# Altium PCB Portablizer_PCBV4.PcbDoc
Units mm, origin at the board's own origin, x right, y up, seen from the top; angles counter-clockwise.
Board outline 73.91 x 92.08 mm, 2 copper layers (Top Layer, Bottom Layer); 79 components, 55 nets, 296 pads, 106 vias.
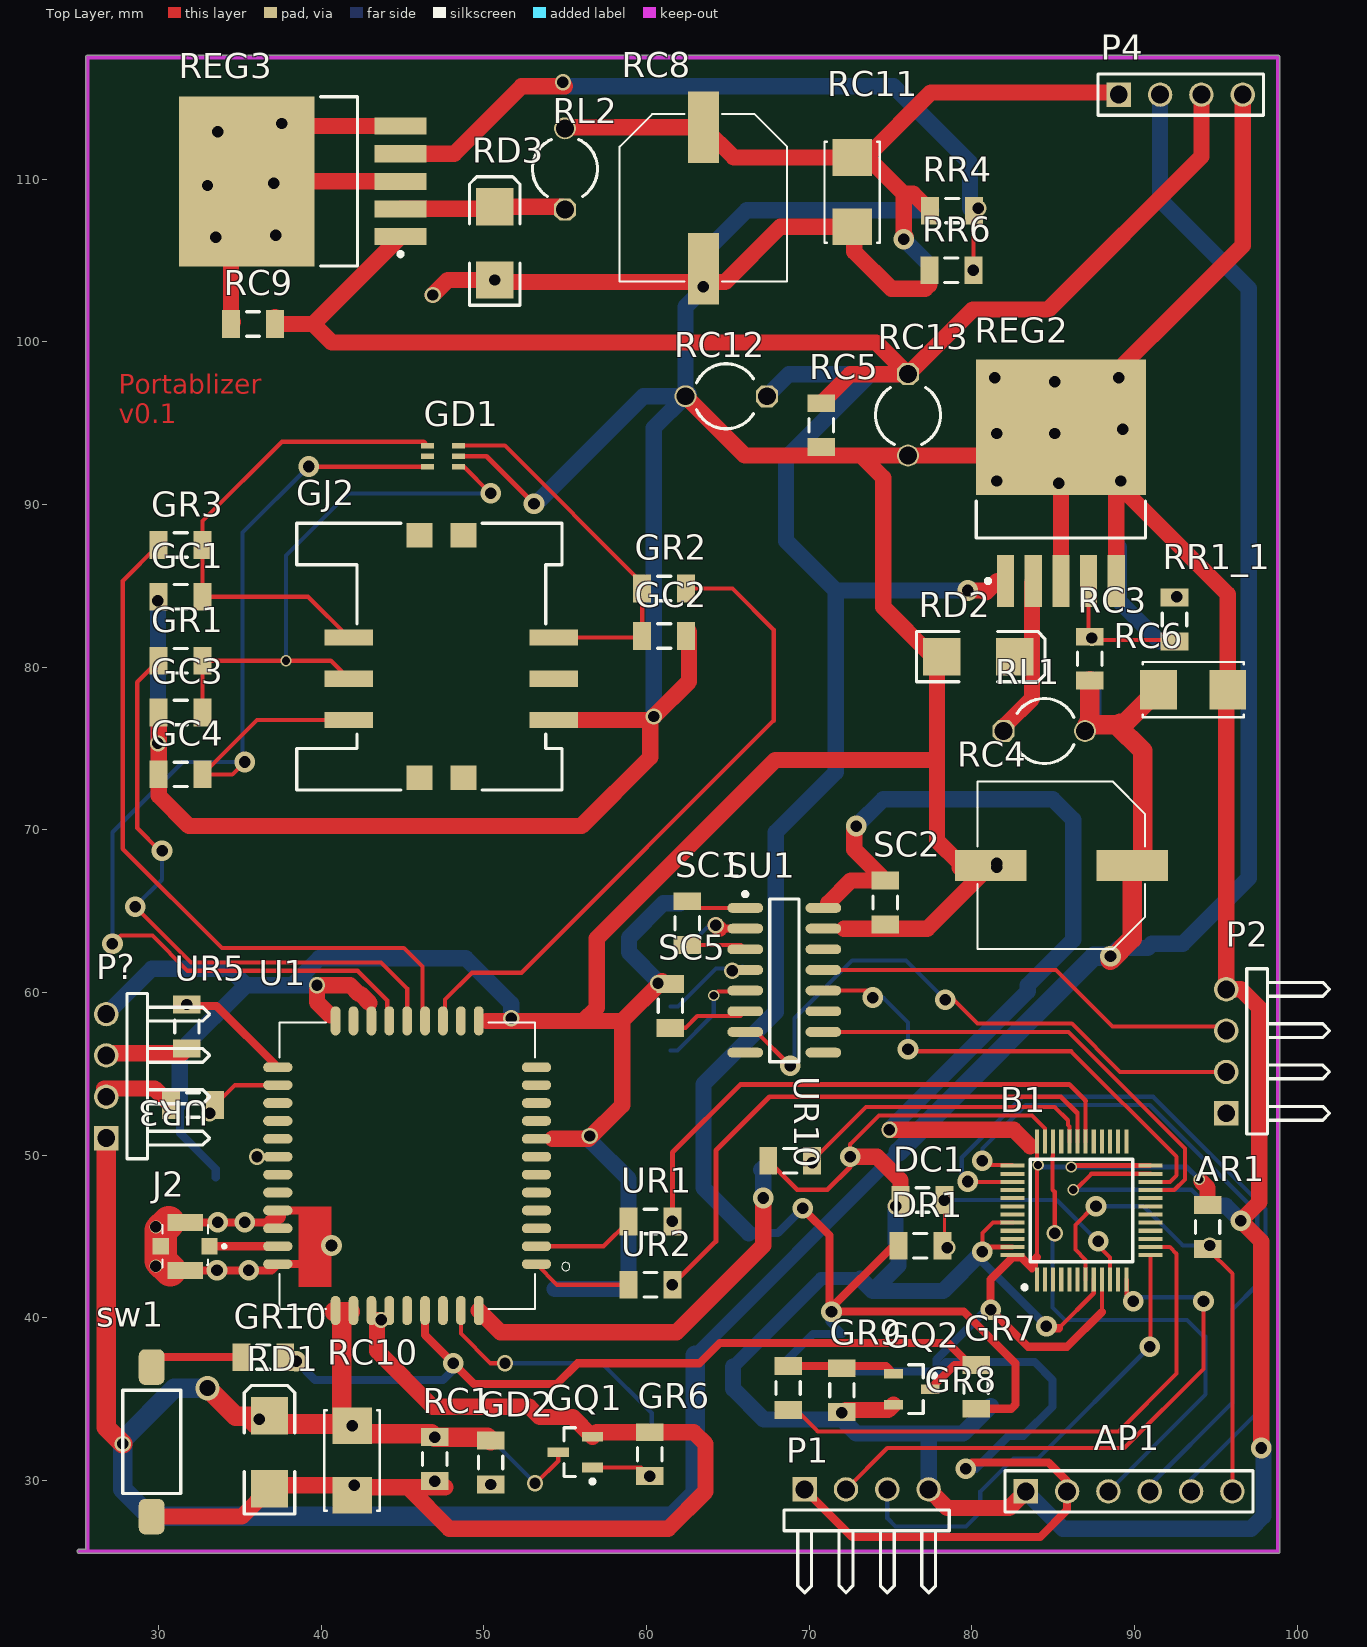
[diagram p0: Top Layer view]
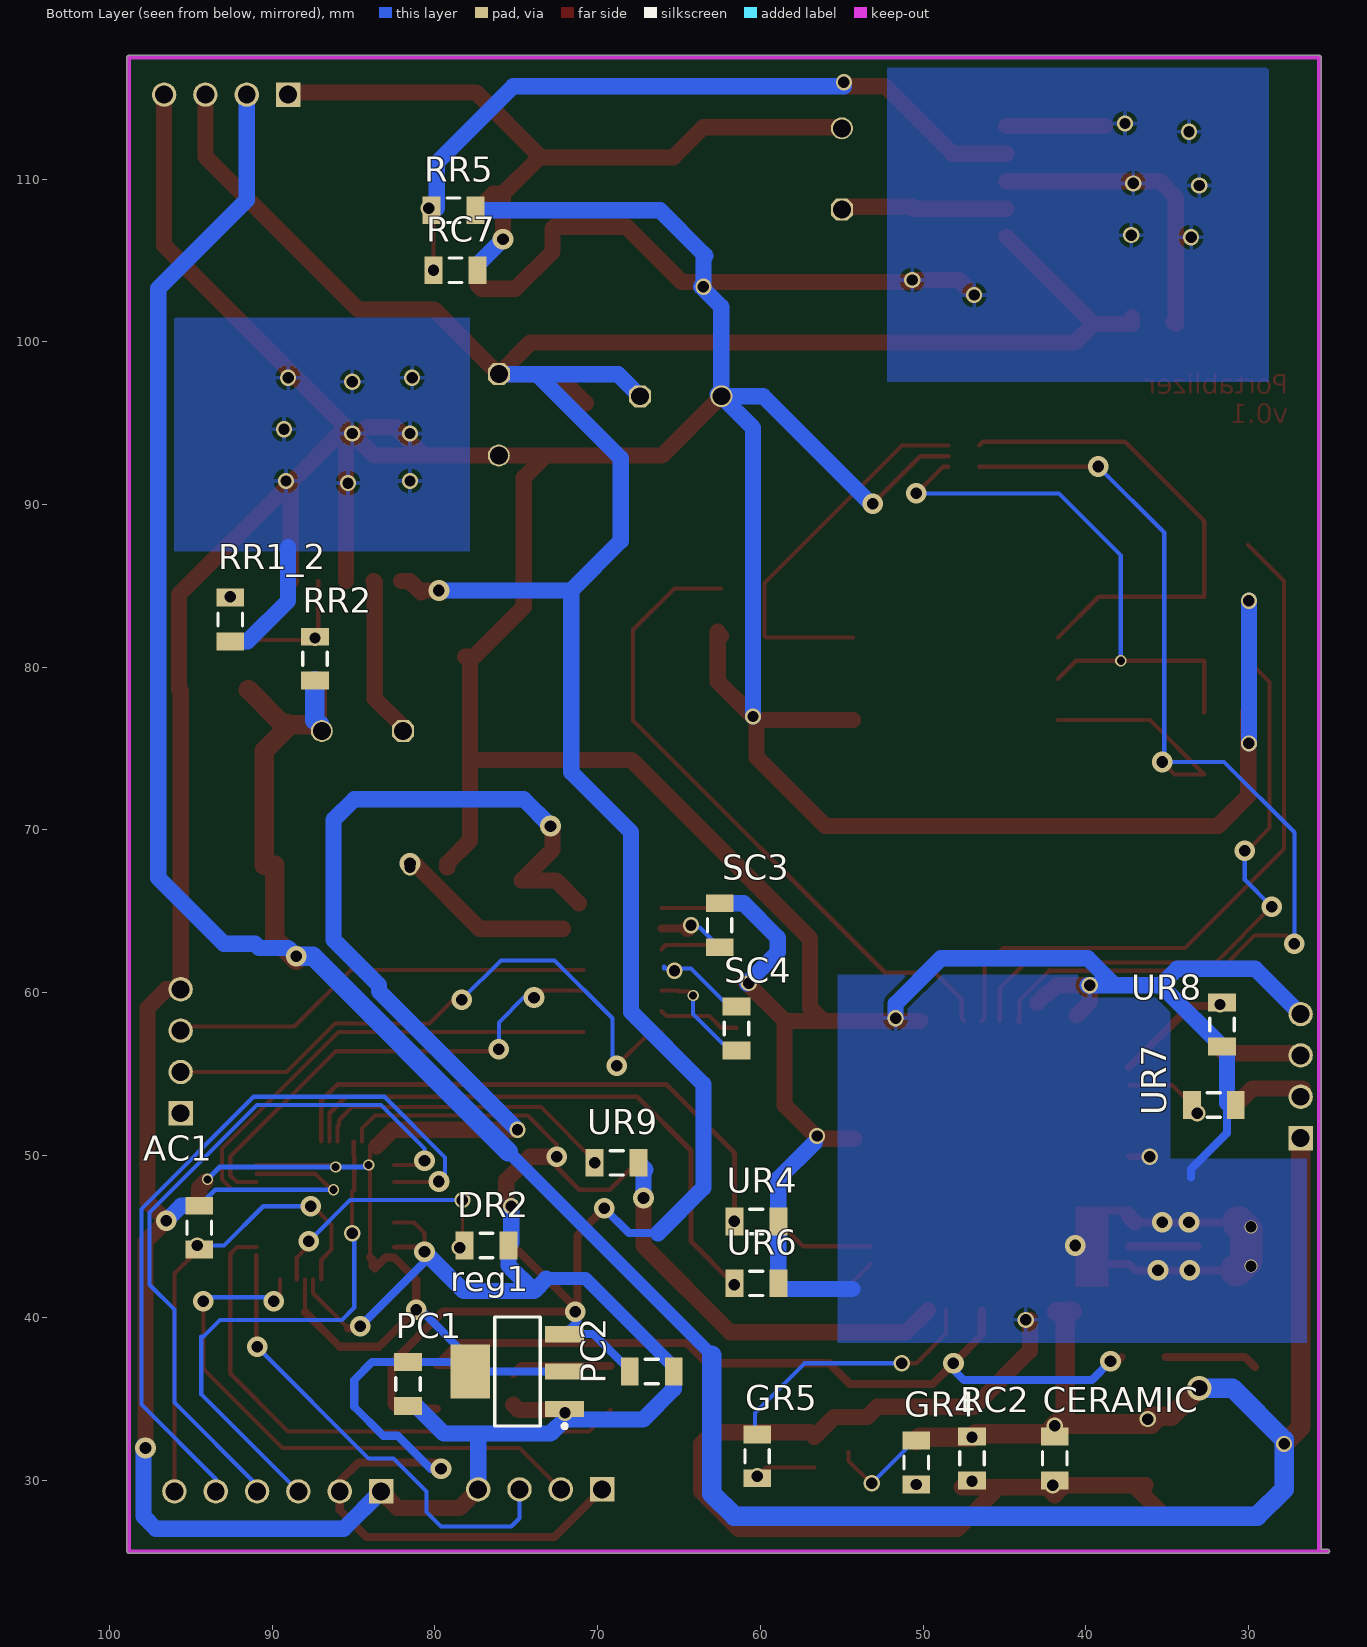
[diagram p1: Bottom Layer view, seen from below]

## Layer stack, top to bottom
Top Solder: solder mask 0.0102, Solder Resist, Dk 3.5
Top Layer: signal copper 0.0356
Dielectric 1: dielectric 0.32, FR-4, Dk 4.8
Bottom Layer: signal copper 0.0356
Bottom Solder: solder mask 0.0102, Solder Resist, Dk 3.5

## Board outline
25.146,25.527 cw(c25.146,25.654) 25.146,25.781 25.527,25.781 25.527,117.475 cw(c25.654,117.475) 25.654,117.602 98.806,117.602 cw(c98.806,117.475) 98.933,117.475 98.933,25.654 cw(c98.806,25.654) 98.806,25.527

## Design rules (kind name [scope] priority, off if disabled: settings)
Clearance [All] p1: gap=0.254 ignorepadtopadclearanceinfootprint=FALSE except(0: Arc-Hole Track-Hole SMDPad-Hole THPad-Hole Via-Hole Fill-Hole Poly-Hole Region-Hole Text-Hole)
PolygonConnect [All] p1: connectstyle=Relief reliefconductorwidth=0.254 reliefentries=4 polygonreliefangle="90 Angle" airgapwidth=0.254
RoutingVias [All] p1: holewidth=0.711 width=1.27 viastyle="Through Hole" minholewidth=0.711 minwidth=1.27 maxholewidth=0.711 maxwidth=1.27
SolderMaskExpansion [All] p1: expansion=0.102
Width Width_1 [(InNet('3.3V') OR InNet('5V_POS') OR InNet('NetRD2_2') OR InNet('9V')OR InNet('NetRD3_2') OR InNet('v12') OR InNet('GND'))] p1: maxlimit=1.2 minlimit=0.254 preferedwidth=0.7 minimp=50.000000 maximp=50.000000 favimp=50.000000
Width [All] p2: maxlimit=1.5 minlimit=0.256 preferedwidth=0.3 minimp=50.000000 maximp=50.000000 favimp=50.000000
30 further rules are at their usual default settings.

## Components (designator, comment, footprint, x,y, rotation, side; value= is the part's Value field where it differs from the comment)
AC1 "Cap Semi" C1206 94.488,45.546 r90 bottom value=100pF
AP1 "ARM CONNECTOR" HDR1X6 83.312,29.337 r0 top
AR1 "Res3" c1206 94.488,45.593 r270 top value=10K
B1 "STM32F100C8T6B" QFP50P900X900X160-48N 86.741,46.609 r90 top
CERAMIC "1~10uF" C1206 41.91,31.369 r90 bottom
DC1 "33pF" C1206 76.962,47.244 r0 top
DR1 "Res3" c1206 76.835,44.432 r0 top value=3M
DR2 "Res3" c1206 76.835,44.45 r180 bottom value=1M
GC1 "33pF" C1206 31.369,84.328 r0 top
GC2 "22pF" C1206 61.087,81.915 r180 top
GC3 "33pF" C1206 31.369,77.216 r0 top
GC4 "100nF" C1206 31.369,73.406 r180 top
GD1 "SMF05C.TCT" SC70-6 47.498,92.964 r90 top
GD2 "LED2" C1206 50.419,31.115 r270 top
GJ2 "SIM_HOLDER" GCT_SIM2055-6-0-XX-00-X_REVI 48.006,80.645 r90 top
GQ1 "PMBT3904" SOT23_N#1 55.626,31.75 r180 top
GQ2 "PMBT3904" SOT23_N#2 76.309,35.621 r0 top
GR1 "51" C1206 31.369,80.391 r180 top
GR2 "51" C1206 61.087,84.836 r0 top
GR3 "51" C1206 31.369,87.503 r180 top
GR4 "4.7k" C1206 50.419,31.115 r270 bottom
GR5 "4.7k" C1206 60.198,31.496 r90 bottom
GR6 "47k" C1206 60.198,31.623 r270 top
GR7 "4.7k" C1206 80.264,35.767 r270 top
GR8 "4.7k" C1206 68.707,35.687 r270 top
GR9 "47k" C1206 72.009,35.56 r90 top
GR10 "4.7k" C1206 36.449,37.592 r180 top
J2 "1661" MOLEX_1661 31.648,44.399 r90 top
P1 "DEBUG" HDR1X4H 69.723,29.464 r0 top
P2 "POS_CONNECTOR" HDR1X4H 95.631,52.578 r90 top
P4 "Header 4" HDR1X4 89.027,115.189 r0 top
P? "DEBUG" HDR1X4H 26.797,51.054 r90 top
PC1 "Cap Semi" C1206 81.661,35.941 r270 bottom value=22uF
PC2 "PC1" C1206 66.675,36.703 r180 bottom value=10uF
RC1 "33pF" C1206 46.99,31.323 r90 top
RC2 "10pF" C1206 46.99,31.369 r90 bottom
RC3 "15nF" C1206 87.249,80.518 r90 top
RC4 "470 μF; 25 V" "WCAP-PSLC 10x12.4x4.5" 85.503,67.818 r180 top
RC5 "100nF" C1206 70.739,94.869 r270 top
RC6 "10uF; 25V" CAPCP6032X280N 93.599,78.613 r0 top
RC7 "15nF" C1206 78.74,104.394 r0 bottom
RC8 "470 μF; 25 V" "WCAP-PSLC 10x12.4x4.5" 63.5,108.839 r270 top
RC9 "100nF" C1206 35.814,101.092 r180 top
RC10 "10uF; 25V" CAPCP6032X280N 41.91,31.242 r270 top
RC11 "10uF; 25V" CAPCP6032X280N 72.644,109.195 r270 top
RC12 "1000uF 16V" CAPR5-4X5 64.897,96.647 r180 top value=100pF
RC13 "1000uF 16V" CAPR5-4X5 76.073,95.504 r270 top value=100pF
RD1 "CDZ55" SMB 36.83,31.75 r90 top
RD2 "SM5822" SMB 80.391,80.645 r0 top
RD3 "SM5822" SMB 50.673,106.045 r90 top
reg1 "ams1117-3.3" SOT223_N 74.93,36.703 r0 bottom
REG2 "LM2596S-ADJ" TS5B_N 85.471,91.292 r90 top
REG3 "LM2596S-ADJ" TS5B_N 38.883,109.855 r180 top
RL1 "68uH 3.1A (47 33)" CAPR5-4X5 84.455,76.073 r0 top value=10mH
RL2 "68uH 3.1A (47 33)" CAPR5-4X5 54.991,110.617 r90 top value=10mH
RR1_1 "1k; 1%" C1206 92.456,82.931 r270 top
RR1_2 "1k; 1%" C1206 92.583,82.931 r90 bottom
RR2 "4.7k; 1%" C1206 87.376,80.518 r90 bottom
RR4 "5.6k; 1%" C1206 78.787,108.059 r0 top
RR5 "1.8k; 1%" C1206 78.867,108.077 r0 bottom
RR6 "33k; 1%" C1206 78.74,104.394 r0 top
SC1 "100nF" C1206 62.502,64.262 r90 top
SC2 "100nF" C1206 74.676,65.532 r90 top
SC3 "100nF" C1206 62.502,64.135 r90 bottom
SC4 "100nF" C1206 61.468,57.785 r270 bottom
SC5 "100nF" C1206 61.468,59.182 r270 top
SU1 "MAX3232ESE+" SO-16_N 68.471,60.753 r0 top
sw1 "Switch PB" "TE FSMSMTR" 29.591,32.385 r180 top
U1 "SIM800C" LCC110P1570X1760X250-42N 45.292,49.356 r180 top
UR1 "Res3" c1206 60.245,45.932 r0 top value=1K
UR2 "Res3" c1206 60.245,42.037 r180 top value=1K
UR3 "Res3" c1206 32.131,53.086 r180 top value=1K
UR4 "Res3" c1206 60.245,45.932 r180 bottom value=5.6K
UR5 "Res3" c1206 31.75,57.912 r90 top value=1K
UR6 "Res3" c1206 60.245,42.122 r180 bottom value=5.6K
UR7 "Res3" c1206 32.131,53.086 r180 bottom value=5.6K
UR8 "Res3" c1206 31.623,58.039 r270 bottom value=5.6K
UR9 "Res3" c1206 68.834,49.53 r180 bottom value=1K
UR10 "Res3" c1206 68.834,49.657 r180 top value=5.6K

## Footprints (in the part's own frame and the unit in brackets; to place one, negate y for a bottom-side part, rotate by r counter-clockwise, add the part's x,y. Pads: shape width x height; smd on the part's side, far side on the other; paste and mask are expansions set on the pad)
C1206 [mm] "Chip Capacitor, Body 3.2x1.6mm, IPC High Density"
  rect 1.1x1.7 smd: 1(-1.35,0) 2(1.35,0)
  silkscreen extent -0.4,-0.75 0.4,0.75, body extent -1.7,-0.9 1.7,0.9, height 1.3
c1206 [mm]
  rect 1.1x1.7 smd: 1(-1.35,0) 2(1.35,0)
  silkscreen extent -0.4,-0.75 0.4,0.75, body extent -1.7,-0.9 1.7,0.9, height 1.3
CAPCP6032X280N [mil]
  rect 89x95 smd: 1(-84,0) 2(84,0)
  silkscreen extent -122,-67 122,67
CAPR5-4X5 [mm]
  oct 1.35x1.35 hole 1.1: 1(-2.5,0)
  round 1.35 hole 1.1: 2(2.5,0)
  silkscreen extent -1.69,-2 1.82,2
GCT_SIM2055-6-0-XX-00-X_REVI [mm]
  rect 1.5x1.6 smd: 8(-7.45,-0.75) 9(7.45,-0.75) 10(7.45,1.95) 11(-7.45,1.95)
  rect 1x3 smd: C1(-3.9,6.3) C2(-1.36,6.3) C3(1.18,6.3) C5(-3.9,-6.3) C6(-1.36,-6.3) C7(1.18,-6.3)
  silkscreen extent -8.2,-6.8 8.2,9.5
HDR1X4 [mm] "Connector; Header; 4 Position"
  rect 1.5x1.5 hole 1.1: 1(0,0)
  round 1.5 hole 1.1: 2(2.54,0) 3(5.08,0) 4(7.62,0)
  silkscreen extent -1.27,-1.27 8.89,1.27
HDR1X4H [mm] "Connector; Header; 4 Position; Right Angle"
  rect 1.5x1.5 hole 1.1: 1(0,0)
  round 1.5 hole 1.1: 2(2.54,0) 3(5.08,0) 4(7.62,0)
  silkscreen extent -1.27,-6.35 8.89,-1.27
HDR1X6 [mm] "Connector; Header; 6 Position"
  rect 1.5x1.5 hole 1.1: 1(0,0)
  round 1.5 hole 1.1: 2(2.54,0) 3(5.08,0) 4(7.62,0) 5(10.16,0) 6(12.7,0)
  silkscreen extent -1.27,-1.27 13.97,1.27
LCC110P1570X1760X250-42N [mm]
  oval 1.8x0.6 smd: 1(-7.95,6.05) 2(-7.95,4.95) 3(-7.95,3.85) 4(-7.95,2.75) 5(-7.95,1.65) 6(-7.95,0.55) 7(-7.95,-0.55) 8(-7.95,-1.65) 9(-7.95,-2.75) 10(-7.95,-3.85) 11(-7.95,-4.95) 12(-7.95,-6.05) 22(7.95,-6.05) 23(7.95,-4.95) 24(7.95,-3.85) 25(7.95,-2.75) 26(7.95,-1.65) 27(7.95,-0.55) 28(7.95,0.55) 29(7.95,1.65) 30(7.95,2.75) 31(7.95,3.85) 32(7.95,4.95) 33(7.95,6.05)
  oval 0.6x1.8 smd: 13(-4.4,-8.9) 14(-3.3,-8.9) 15(-2.2,-8.9) 16(-1.1,-8.9) 17(0,-8.9) 18(1.1,-8.9) 19(2.2,-8.9) 20(3.3,-8.9) 21(4.4,-8.9) 34(4.4,8.9) 35(3.3,8.9) 36(2.2,8.9) 37(1.1,8.9) 38(0,8.9) 39(-1.1,8.9) 40(-2.2,8.9) 41(-3.3,8.9) 42(-4.4,8.9)
  silkscreen extent -10,-8.8 7.85,8.8
MOLEX_1661 [mm]
  rect 1x1 smd: 1(0,-1.5) 3(0,1.5)
  rect 1.05x2.2 smd: 2(-1.475,0) 4(1.475,0)
  silkscreen extent -1.3,-2.5 1.3,1.4
QFP50P900X900X160-48N [mm]
  rect 1.475x0.25 smd: 1(-4.238,2.75) 2(-4.238,2.25) 3(-4.238,1.75) 4(-4.238,1.25) 5(-4.238,0.75) 6(-4.238,0.25) 7(-4.238,-0.25) 8(-4.238,-0.75) 9(-4.238,-1.25) 10(-4.238,-1.75) 11(-4.238,-2.25) 12(-4.238,-2.75) 25(4.238,-2.75) 26(4.238,-2.25) 27(4.238,-1.75) 28(4.238,-1.25) 29(4.238,-0.75) 30(4.238,-0.25) 31(4.238,0.25) 32(4.238,0.75) 33(4.238,1.25) 34(4.238,1.75) 35(4.238,2.25) 36(4.238,2.75)
  rect 0.25x1.475 smd: 13(-2.75,-4.238) 14(-2.25,-4.238) 15(-1.75,-4.238) 16(-1.25,-4.238) 17(-0.75,-4.238) 18(-0.25,-4.238) 19(0.25,-4.238) 20(0.75,-4.238) 21(1.25,-4.238) 22(1.75,-4.238) 23(2.25,-4.238) 24(2.75,-4.238) 37(2.75,4.238) 38(2.25,4.238) 39(1.75,4.238) 40(1.25,4.238) 41(0.75,4.238) 42(0.25,4.238) 43(-0.25,4.238) 44(-0.75,4.238) 45(-1.25,4.238) 46(-1.75,4.238) 47(-2.25,4.238) 48(-2.75,4.238)
  silkscreen extent -4.85,-3.15 3.15,3.62
SC70-6 [mm]
  rect 0.35x0.8 smd: 1(-0.65,-0.95) 2(0,-0.95) 3(0.65,-0.95) 4(0.65,0.95) 5(0,0.95) 6(-0.65,0.95)
SMB [mm]
  rect 2.3x2.3 smd: 1(-2.25,0) 2(2.25,0)
  silkscreen extent -3.8,-1.55 4.1,1.55
SO-16_N [mm] "SOIC, 16-Leads, Body 9.9x3.9mm, Pitch 1.27mm, IPC Medium Density"
  oval 2.2x0.6 smd: 1(-2.4,4.445) 2(-2.4,3.175) 3(-2.4,1.905) 4(-2.4,0.635) 5(-2.4,-0.635) 6(-2.4,-1.905) 7(-2.4,-3.175) 8(-2.4,-4.445) 9(2.4,-4.445) 10(2.4,-3.175) 11(2.4,-1.905) 12(2.4,-0.635) 13(2.4,0.635) 14(2.4,1.905) 15(2.4,3.175) 16(2.4,4.445)
  silkscreen extent -2.52,-5 0.9,5.42, body extent -2,-5 2,5, height 1.75
SOT23_N#1 [mm]
  rect 1.3x0.6 smd: 1(-1.05,0.95) 2(-1.05,-0.95) 3(1.05,0)
  silkscreen extent -1.18,-1.5 0.7,1.92, body extent -0.7,-1.5 0.7,1.5, height 1.1
SOT23_N#2 [mm] "SOT23, 3-Leads, Body 2.9x1.3mm, Pitch 0.95mm, Lead Span 2.3mm - Reverse Pinning, IPC Medium Density"
  rect 1.15x0.6 smd: 1(-1.125,0.95) 2(-1.125,-0.95) 3(1.125,0)
  silkscreen extent -0.2,-1.5 1.48,1.5, body extent -0.7,-1.5 0.7,1.5, height 1.1
SOT223_N [mm] "SOT223, 4-Leads, Body 6.5x3.5mm, Pitch 2.3mm, Lead Span 7mm, IPC Medium Density"
  rect 2.4x1 smd: 1(-2.9,2.3) 2(-2.9,0) 3(-2.9,-2.3)
  rect 2.4x3.3 smd: 4(2.9,0)
  silkscreen extent -3.02,-3.35 1.4,3.47, body extent -1.85,-3.35 1.85,3.35, height 1.7
"TE FSMSMTR" [mm]
  rrect50% 1.6x2.19 smd: 1(0,4.595) 2(0,-4.595)
  silkscreen extent -1.78,-3.18 1.78,3.18, body extent -1.75,-4.98 1.75,4.98, height 4.42
TS5B_N [mm]
  rect 3.2x1.05 smd: 1(-6,3.4) 2(-6,1.7) 3(-6,0) 4(-6,-1.7) 5(-6,-3.4)
  rect 8.3x10.45 smd: 6(3.45,0)
  silkscreen extent -6.12,-5.2 -1.1,5.2, body extent -3.35,-5.2 6.05,5.2, height 4.65
"WCAP-PSLC 10x12.4x4.5" [mm]
  rect 4.4x1.9 smd: 1(-4.35,0) 2(4.35,0)
  silkscreen extent -5.15,-5.15 5.15,5.15, body extent -5.5,-5.15 5.5,5.15, height 12.45

## Part data
AC1 PC1: "Capacitor (Semiconductor SIM Model)", LatestRevisionDate=29-May-2009, LatestRevisionNote="IPC-7351 Footprint Added.", PackageDescription="Chip Capacitor", PackageReference=C1206, Published=8-Jun-2000, Publisher="Altium Limited"
AP1: library part "Header 6", "Header, 6-Pin", LatestRevisionDate=17-Jul-2002, LatestRevisionNote="Re-released for DXP Platform.", Publisher="Altium Limited"
AR1 DR1 DR2 UR1 UR2 UR3 UR4 UR5 UR6 UR7 UR8 UR9 UR10: "Resistor", LatestRevisionDate=29-May-2009, LatestRevisionNote="IPC-7351 Footprint Added.", PackageDescription="Chip Resistor", PackageReference=J1-0603, Published=8-Jun-2000, Publisher="Altium Limited"
B1: "STM32F100C8T6B, 32 bit ARM Cortex M3 Microcontroller 24MHz 64 kB Flash, 8 kB RAM, I2C 48-Pin LQFP", Manufacturer_Name=STMicroelectronics, Arrow Part Number=STM32F100C8T6B, Datasheet Link=https://www.arrow.com/en/products/stm32f100c8t6b/stmicroelectronics, Geometry.Height=1.6mm, Manufacturer_Part_Number=STM32F100C8T6B
CERAMIC DC1 RC1 RC2 RC3 RC6 RC7 RC10 RC11: library part Cap, "Capacitor", LatestRevisionDate=17-Jul-2002, LatestRevisionNote="Re-released for DXP Platform.", PackageDescription="Radial Cap, Thru-Hole; 2 Leads; 0.3 in Pin Spacing", PackageReference=RAD-0.3, Published=8-Jun-2000, Publisher="Altium Limited", STATE=NOT-AVAILABLE, TYPE=tantalum
GC1 GC2 GC3 GC4 RC5 RC9: library part Cap-Bipolar, "Bipolar Capacitor", Voltage=100V, Adding Date=1387/12/20, Designer="Saeid Jorablo", Organazation=ControTec
GD1: Package="SOT-363 Diodes Inc.", Availability=Unavailable, MF=Semtech, MP=SMF05C.TCT, Price=None
GD2: "Typical RED, GREEN, YELLOW, AMBER GaAs LED", LatestRevisionDate=17-Jul-2002, LatestRevisionNote="Re-released for DXP Platform.", PackageDescription="SM LED; 2 Flat Leads", PackageReference=3.2X1.6X1.1, PackageVersion=Feb-2002, Published=8-Jun-2000, Publisher="Altium Limited"
GJ2: library part SIM5051-6-0-18-00-X_REVF, "Memory Socket, Sim Card, 6pos", Package=None, Availability=Unavailable, MF="Global Connector Technology", MP="SIM5051-6-0-18-00-A REV C", Price=None
GQ1 GQ2: "NPN Switching Transistor", ComponentLink1Description="Manufacturer Link", ComponentLink1URL=http://www.semiconductors.philips.com/, ComponentLink2Description=Datasheet, ComponentLink2URL=http://www.semiconductors.philips.com/acrobat/datasheets/PMBT3904_4.pdf, DatasheetVersion=27-Apr-1999, LatestRevisionDate=12-Dec-2006, LatestRevisionNote="IPC-7351 Footprint Added.", PackageDescription="3-Pin SOT-23 Package 0.95 mm Pitch, 2.3 mm Lead Span", PackageReference=SOT23, PackageVersion=May-1999, Published=17-Sep-2003, Publisher="Altium Limited"
GR1 GR2 GR3 GR4 GR5 GR6 GR7 GR8 GR9 GR10: library part Resistor, "Resistor"
J2: "uFL SMT Antenna Connector", Package=None, Availability=Unavailable, MF="Keystone Electronics", MP=1661, Price=None, SnapEDA_Link=https://www.snapeda.com/parts/1661/Keystone%20Electronics/view-part/?ref=snap
P1 P2 P?: library part "Header 4H", "Header, 4-Pin, Right Angle", LatestRevisionDate=17-Jul-2002, LatestRevisionNote="Re-released for DXP Platform.", Publisher="Altium Limited"
P4: "Header, 4-Pin", LatestRevisionDate=17-Jul-2002, LatestRevisionNote="Re-released for DXP Platform.", Publisher="Altium Limited"
PC2: library part "Cap Semi", "Capacitor (Semiconductor SIM Model)", LatestRevisionDate=29-May-2009, LatestRevisionNote="IPC-7351 Footprint Added.", PackageDescription="Chip Capacitor", PackageReference=C1206, Published=8-Jun-2000, Publisher="Altium Limited"
RC4 RC8: library part "WCAP-PSLC 10x12.4x4.5 875075361006", "WCAP-PSLC Aluminum Polymer Capacitors , 680 µF; + / - 20%; 16 V , 10 x 12,4", Capacitance="680 µF", Manufacturer="Wurth Elektronik", partNo=875075361006, Application="Low voltage port filtering, appplid to high-end switching power supply, PC(desktop,laptop ),industrial computer, VGA card, server power, charger, TV, digital set-top box,DC-DC power module, game machine etc which consume large current with high speed circuit.", Characteristics="Aluminum Polymer Capacitors; Recommended soldering: Reflow; Operating temperature: –55 °C to +105 °C; Large capacitance SMD product series; Very low ESR at high frequency range; High permissible ripple current; Long life and high reliability; Load life: 2000 h @ +105 °C", ComponentLink1Description=Manufacturer, ComponentLink1URL=http://www.we-online.com, ComponentLink2Description=Datasheet, ComponentLink2URL=http://katalog.we-online.de/pbs/datasheet/875075361006.pdf, Created by="Karrer Zheng", Created Date=6/8/2015, E-mail=libraries@we-online.com
RC12 RC13: library part "Cap Pol1", "Polarized Capacitor (Radial)", LatestRevisionDate=17-Jul-2002, LatestRevisionNote="Re-released for DXP Platform.", PackageDescription="Polarized Capacitor (Radial); 2 Leads", PackageReference=RB7.6-15, Published=8-Jun-2000, Publisher="Altium Limited"
RD1 RD2 RD3: library part "D Schottky", "Schottky Diode", Code_JEDEC=DO-214-AA, LatestRevisionDate=17-Jul-2002, LatestRevisionNote="Re-released for DXP Platform.", PackageDescription="DO-214-AA/SMB; 2 C-Bend Leads; Body 5.3 x 3.6 mm, inc. leads (LxW)", PackageReference=SMB, Published=8-Jun-2000, Publisher="Altium Limited"
REG2 REG3: "SIMPLE SWITCHER® Power Converter 150 KHz 3A Step-Down Voltage Regulator, 5-pin TO-263", Manufacturer="National Semiconductor", PackageTopMarking="NSUZXYTTE#*LM2596S*-ADJ P+", PowerWise=N, Supplier Part Number 1=1523864, Code_JEDEC=MO-169-AB, ComponentLink1Description="LM2596 Datasheet", ComponentLink1URL=http://www.national.com/ds/LM/LM2596.pdf, ComponentLink2Description="LM2596 Web Page", ComponentLink2URL=http://www.national.com/pf/LM/LM2596.html, ComponentLink3Description="TS5B Package Page", ComponentLink3URL=http://www.national.com/packaging/folders/ts5b.html, CompType=Switcher, DatasheetVersion=May-2002, PackageDescription="TO-263, Molded, .400 x .390 x .180in, 5 Lead, .067in Pitch, Surface Mount", PackageReference=TS5B, PackageVersion="revD, Apr-2005", PartNumber=LM2596S-ADJ, PinCount=5, Published=4-Dec-2008, Publisher="Altium Limited", RoHS=N, Supplier 1=Farnell, Supplier 2=Farnell, Supplier Part Number 2=9494367
RL1 RL2: library part Inductor, "Inductor", Code_IEC=1005, Code_JEITA=0402, LatestRevisionDate=29-May-2009, LatestRevisionNote="IPC-7351 Footprint Added.", PackageDescription="Chip Inductor", PackageReference=0402-A, Published=8-Jun-2000, Publisher="Altium Limited"
RR1_1 RR1_2 RR2 RR4 RR5 RR6: library part Res1, "Resistor", LatestRevisionDate=17-Jul-2002, LatestRevisionNote="Re-released for DXP Platform.", PackageDescription="Axial Device, Thru-Hole; 2 Leads; 0.3 in Pin Spacing", PackageReference=AXIAL-0.3, Published=8-Jun-2000, Publisher="Altium Limited"
SC1 SC2 SC3 SC4 SC5: library part "Cap Semi", "Capacitor", Dielectric=X7R, Package=0603, Tolerance=10%, Category=Capacitor, Company=AVX, Foreign Supplyer=False, Subcategory=Ceramic
SU1: library part MAX3232CSE, "3.0V TO 5.5V, Low-Power, up to 1Mbps, True RS-232 Transceiver Using Four 0.1µF External Capacitor", Package=SO16, Category=IC, Company=MAXIM, Foreign Supplyer=False, Part Number=MAX3232ESE+, Subcategory=MAX
sw1: "Push Button Switch"
U1: "Module: GSM/Bluetooth; GPRS; 2G; 1800MHz, 900MHz; 85.6kbps; SMD", Package=None, Availability=Unavailable, MF=Simcom, MP=SIM800C, Price=None, SnapEDA_Link=https://www.snapeda.com/parts/SIM800C/Simcom/view-part/?ref=snap

## Via types
v1: diameter 1, hole 0.7, Top Layer to Bottom Layer, 57 vias
v2: diameter 1.27, hole 0.711, Top Layer to Bottom Layer, 40 vias
v3: diameter 0.7, hole 0.5, Top Layer to Bottom Layer, 6 vias
v4: diameter 0.8, hole 0.7, Top Layer to Bottom Layer, 2 vias
v5: diameter 1.5, hole 1, Top Layer to Bottom Layer, 1 vias

## Nets (pads, with @x,y where several pads share a name; then routed paths per layer and width w, separated by ;. In a path a pad name is that pad's centre, name@x,y a point inside that pad or via, vN(x,y) a via of type N, cw(c..) or ccw(c..) an arc to the next point about the centre after c; other vN are vias at no path point)
3.3V: AP1.2 AR1.1 B1.1 B1.9 B1.24 B1.36 B1.48 P1.1 PC1.1 reg1.2 reg1.4 SC2.2 SU1.16 | length 150.2
  Top Layer w0.25: 83.991,43.732 B1.36@83.991,50.546 ; 87.991,40.366 B1.9
  Top Layer w0.3: v3(86.106,49.276) 86.189,49.359 B1.24
  Top Layer w0.5: P1.1 72.644,26.543 84.201,26.543 85.852,28.194 AP1.2 85.852,29.972 84.709,31.115 80.01,31.115 v2(79.629,30.734) ; 83.991,43.732 83.82,43.561 83.82,43.18 83.693,43.053 83.041,43.705 82.503,43.705 81.153,42.355 v2(81.153,40.513) 83.439,38.227 85.852,38.227 87.991,40.366
  Top Layer w1: SU1.16@71.163,65.49 72.555,66.882 SC2.2 72.771,68.787 72.771,70.104 v2(72.898,70.231) ; v1(74.93,51.562) 82.571,51.562 83.587,50.546 ; v3@94.107,48.387 94.488,48.006 AR1.1
  Bottom Layer w0.3: v3(84.074,49.403) 84.074,49.276 v3(86.106,49.276) 93.218,49.276 v3(93.98,48.514)
  Bottom Layer w0.5: reg1.2 reg1.4 ; v2(79.629,30.734) 80.264,30.734 82.293,32.763 83.182,32.763 84.963,34.544 84.963,36.195 83.867,37.291 PC1.1 78.418,37.291 reg1.4 ; v2(81.153,40.513) 81.026,40.64 80.899,40.64 80.899,40.513 77.83,37.444 reg1.4
  Bottom Layer w1: v2(72.898,70.231) 74.549,71.882 84.963,71.882 86.233,70.612 86.233,63.246 83.439,60.452 83.439,60.081 v1@75.052,51.694
5V_POS: P2.1
9V: P4.1 RC7.1 RC8.1 RC11.1 RL2.2 RR4.1 | length 47.3
  Top Layer w1: RL2.2 55.063,113.189 RC8.1 65.361,111.328 RC11.1 73.482,111.328 RC11.1@73.533,111.379 ; v2(75.819,106.299) 75.946,106.426 75.819,106.553 75.819,109.093 ; RR4.1 76.403,109.093 75.819,109.093 ; P4.1 88.9,115.316 77.47,115.316 RC11.1@73.533,111.379 ; RC11.1@73.533,111.379 75.819,109.093
  Bottom Layer w1: v2(75.819,106.299) 77.39,104.728 RC7.1
GND: AC1.2 AP1.1 B1.8 B1.23 B1.35 B1.44 B1.47 CERAMIC.1 DC1.1 DR2.2 GC1.1 GC2.1 GC3.1 GC4.2 GD1.2 GJ2.C5 GQ1.2 GQ2.2 GR6.1 GR9.1 J2.2 J2.3 J2.4 P1.4 P2.4 P4.4 P?.4 PC1.2 PC2.2 RC1.1 RC2.1 RC4.2 RC5.2 RC6.2 RC8.2 RC9.2 RC10.2 RC11.2 RC12.2 RC13.2 RD1.1 RD2.1 RD3.1 reg1.1 REG2.3 REG2.5 REG2.6 REG3.3 REG3.5 REG3.6 RR1_2.1 RR5.1 RR6.1 SC2.1 SC3.2 SC5.1 SU1.15 sw1.1 U1.8 U1.13 U1.19 U1.21 U1.27 U1.30 U1.31 U1.33 U1.36 U1.37 UR4.2 UR6.2 UR7.2 UR8.2 UR10.2 | length 726.1
  Top Layer w0.25: 85.344,39.37 87.491,41.517 B1.8
  Top Layer w0.254: v2(72.517,49.911) 72.517,50.672 74.295,52.45 83.694,52.45 84.491,51.653 B1.35 ; v2(80.645,44.069) 80.645,45.212 81.292,45.859 B1.44 ; v3(86.233,47.879) 86.36,47.879 87.34,48.859 B1.23
  Top Layer w0.3: GD1.2 50.165,92.964 v2(53.086,90.043) ; UR10.2 69.262,47.879 71.12,47.879 72.517,49.276 v2(72.517,49.911) ; v2@80.935,44.359 B1.47
  Top Layer w0.4: v1(36.063,49.906) U1.27
  Top Layer w0.5: J2.4@30.634,45.874 J2.4 v2(33.655,45.874) v2(35.306,45.874) 36.974,45.874 ; J2.2@30.736,42.924 J2.2 v2(33.604,42.924) v2(35.56,42.924) 36.96,42.924 U1.33 39.115,43.306 40.259,44.45 v2(40.64,44.45) ; 37.342,46.242 U1.30 38.992,46.606 39.751,45.847 ; v2(80.645,44.069) v2@80.935,44.359 ; v2(84.582,39.497) 84.709,39.37 85.344,39.37
  Top Layer w1: sw1.1 35.12,27.79 RD1.1 ; GC3.1 GC4.2 30.019,72.089 31.877,70.231 56.007,70.231 60.235,74.459 v1@60.235,76.745 ; RD1.1@36.322,29.718 41.3,29.718 RC10.2 42.393,29.591 45.339,29.591 ; 36.974,45.874 37.342,46.242 ; REG3.6@38.833,113.255 REG3.5 ; 40.557,58.591 39.751,59.397 39.751,60.198 40.005,60.452 41.783,60.452 42.325,59.91 42.429,59.91 42.978,59.361 ; v1(43.688,39.878) 43.434,39.878 43.434,37.973 46.863,34.544 52.799,34.544 53.434,33.909 55.467,33.909 GQ1.2 56.949,32.973 GR6.1 62.912,32.973 63.627,32.258 63.627,29.337 61.341,27.051 47.879,27.051 45.339,29.591 ; REG3.3 REG3.6 34.464,108.886 RC9.2@34.464,101.219 ; v1(46.863,102.87) 47.788,103.795 v1(50.673,103.795) ; RC1.1@47.625,29.591 45.339,29.591 ; 50.165,58.256 56.134,58.256 ; RD3.1@50.292,103.668 64.838,103.668 68.231,107.061 RC11.2 ; 54.229,51.006 56.436,51.006 58.51,53.08 58.51,58.256 ; GJ2.C5 v1@60.235,76.745 ; SC5.1@60.96,60.706 58.51,58.256 ; RC12.2 66.04,93.004 73.192,93.004 ; GC2.1 GC2.1@62.484,81.868 ; GC2.1@62.611,82.169 62.611,79.121 v1(60.452,76.962) v1@60.235,76.745 ; 72.136,63.928 77.263,63.928 RC4.2 ; GR9.1@72.263,34.337 74.85,34.337 GQ2.2 ; v2(72.517,49.911) 74.168,49.911 75.612,48.467 DC1.1 ; RC11.2@72.771,106.959 72.771,105.537 75.057,103.251 77.136,103.251 77.39,103.505 ; P1.4 78.486,28.321 82.296,28.321 AP1.1 ; RD2.1@77.851,80.391 77.851,74.295 ; RD2.1 77.597,80.645 74.549,83.693 74.549,91.647 73.192,93.004 ; RC4.2@79.248,67.691 79.248,67.945 77.851,69.342 77.851,74.295 ; REG2.6@84.201,94.742 82.423,94.742 REG2.6@80.685,93.004 ; REG2.3 REG2.6 ; REG2.5 REG2.6@88.871,91.342 ; P4.4 96.647,105.918 REG2.6 ; v2(97.79,32.004) 97.79,44.704 v2(96.52,45.974) 97.663,47.117 97.663,59.055 96.52,60.198 P2.4 95.631,78.511 RC6.2 95.733,84.48 REG2.6@88.871,91.342 ; RC9.2@34.464,101.219 34.591,101.219 RC9.2 RC9.2@34.464,101.219 ; 56.134,58.256 56.948,59.07 56.948,63.321 67.922,74.295 77.851,74.295 ; 56.134,58.256 58.51,58.256 ; 73.192,93.004 RC13.2 REG2.6@80.685,93.004 ; REG2.6@80.685,93.004 83.733,93.004 v1(85.09,94.361) REG2.6 ; REG2.6 REG2.6@88.871,91.342
  Top Layer w2: J2.4@30.634,45.874 30.148,45.388 J2.3 30.148,43.512 J2.2@30.736,42.924
  Bottom Layer w0.254: v3(86.233,47.879) 93.505,47.879 AC1.2
  Bottom Layer w0.5: UR7.2@31.322,53.213 31.322,51.355 33.528,49.149 33.528,48.641 ; v2@53.086,89.916 v2(53.086,90.043) ; v2(80.645,44.069) 80.645,43.434 v2(84.582,39.497)
  Bottom Layer w0.8: PC2.2@65.325,37.004 70.739,42.418 73.152,42.418
  Bottom Layer w1: P?.4 29.591,61.468 34.37,61.468 35.386,60.452 ; v1(29.972,75.311) v1(29.972,84.074) ; UR7.2@31.322,53.213 31.322,56.388 35.386,60.452 ; v1@39.878,60.452 v1(39.751,60.452) 38.227,60.452 ; v1(51.689,58.42) 51.689,59.309 48.895,62.103 39.878,62.103 38.227,60.452 ; v2@53.086,89.916 59.817,96.647 RC12.2 60.452,94.702 v1(60.452,76.962) ; 54.356,41.783 58.895,41.783 UR6.2 UR4.2 58.895,48.547 v1@56.642,50.8 ; v1@60.827,60.573 58.928,62.471 58.928,63.373 61.04,65.485 SC3.2@62.056,65.485 ; RC12.2@62.611,96.774 62.397,96.774 62.397,102.148 63.627,103.378 63.5,103.505 63.5,105.41 ; 63.373,105.283 63.5,105.41 ; PC2.2@65.325,37.004 PC2.2 65.325,35.64 67.204,33.761 72.03,33.761 72.898,32.893 77.343,32.893 ; 73.152,42.418 73.914,41.656 ; v1(75.311,46.863) 75.311,44.624 DR2.2 75.485,43.227 73.914,41.656 ; P1.4 77.343,32.893 ; RR5.1 66.167,108.077 63.5,105.41 ; v2(80.645,44.069) 78.232,41.656 73.914,41.656 ; PC1.2@81.153,34.591 79.455,32.893 77.343,32.893 ; AP1.1 85.598,27.051 97.155,27.051 97.917,27.813 97.917,32.131 v2(97.79,32.004) ; 89.027,87.376 89.027,84.074 91.52,81.581 RR1_2.1 ; AC1.2 95.598,46.896 v2(96.52,45.974) ; 35.386,60.452 38.227,60.452
  other v1: 42.037,29.718 46.99,29.973 72.009,34.163 56.515,51.181 60.706,60.579 81.534,67.691 85.344,91.313 81.534,91.44 89.154,91.44 81.534,94.361 89.281,94.615 85.09,97.536 81.407,97.79 89.027,97.79 63.5,103.378 33.528,106.426 37.211,106.553 33.02,109.601 37.084,109.728 33.655,112.903 37.592,113.411
  other v2: 81.534,67.945
  other v4: 29.845,43.18 29.845,45.593
GSM_ANT: J2.1 U1.32 | length 4.2
  Top Layer w0.5: J2.1 33.155,44.406 U1.32
NetB1_10: B1.10 DC1.2 DR1.2 DR2.1 | length 16.1
  Top Layer w0.2: DR1.2 78.312,44.559 v1(78.312,47.244)
  Top Layer w0.256: v2(87.757,44.704) 87.63,44.577 88.491,43.716 B1.10
  Bottom Layer w0.256: v1(78.312,47.244) 85.217,47.244 v2(87.757,44.704)
  other v1: 78.486,44.323
NetB1_11: B1.11
NetB1_12: B1.12 P1.2 | length 35.7
  Top Layer w0.256: P1.2 74.801,32.002 89.365,32.002 94.234,36.871 v2(94.234,41.021) v2@93.98,41.275 ; B1.12@89.523,42.371 89.523,41.414 v2(89.916,41.021)
  Bottom Layer w0.256: v2(89.916,41.021) 89.916,41.148 90.043,41.275 93.98,41.275 v2(94.234,41.021)
NetB1_13: B1.13 P1.3 | length 29.3
  Top Layer w0.256: v2(90.932,38.227) 91.059,38.227 91.186,38.354 90.979,38.561 B1.13
  Bottom Layer w0.256: P1.3 74.803,27.686 75.311,27.178 79.629,27.178 80.518,28.067 80.518,29.337 82.55,31.369 84.074,31.369 v2(90.932,38.227)
NetB1_14: B1.14 GR8.2 | length 34.5
  Top Layer w0.256: GR8.2@69.215,34.337 70.532,33.02 79.755,33.02 79.758,33.023 81.024,33.023 81.027,33.02 89.027,33.02 92.583,36.576 92.583,43.942 92.166,44.359 B1.14
NetB1_21: B1.21 SU1.10 | length 29.5
  Top Layer w0.256: SU1.10 85.932,57.578 93.091,50.419 93.091,48.514 92.436,47.859 B1.21
NetB1_22: B1.22 SU1.12 | length 30.1
  Top Layer w0.256: SU1.12 73.486,60.118 v2(73.914,59.69) ; v2(76.073,56.515) 75.946,56.388 86.104,56.388 92.581,49.911 92.581,48.766 92.174,48.359 B1.22
  Bottom Layer w0.256: v2(73.914,59.69) 74.549,59.69 76.073,58.166 v2(76.073,56.515)
NetB1_30: B1.30 UR1.2 UR4.1 | length 34.3
  Top Layer w0.25: B1.30 86.991,53.344
  Top Layer w0.3: v1(61.595,45.932) 61.595,50.165 65.786,54.356 85.979,54.356 86.991,53.344
NetB1_31: B1.31 UR2.1 UR6.1 | length 35.1
  Top Layer w0.25: B1.31 86.491,52.628
  Top Layer w0.3: v1(61.595,42.037) 64.262,44.704 64.262,50.292 67.564,53.594 85.471,53.594 86.437,52.628
NetB1_32: B1.32 UR9.1 UR10.1 | length 18.8
  Top Layer w0.256: UR10.1 73.486,52.959 85.09,52.959 85.901,52.148 85.901,51.865 85.991,51.775 B1.32
  other v1: 70.184,49.53
NetGC1_2: GC1.2 GD1.4 GJ2.C3 GR3.1 | length 30.6
  Top Layer w0.256: GJ2.C3 39.203,84.328 GC1.2 GR3.1 32.719,88.98 37.592,93.853 46.309,93.853 GD1.4
NetGC2_2: GC2.2 GD1.3 GJ2.C7 GR2.1 | length 23.5
  Top Layer w0.256: GD1.3 51.293,93.614 59.737,85.17 GR2.1 GC2.2 59.647,81.825 GJ2.C7
NetGC3_2: GC3.2 GD1.1 GJ2.C2 GR1.1 | length 35.9
  Top Layer w0.256: GC3.2 GR1.1 v3(37.846,80.391) 40.6,80.391 GJ2.C2 ; GD1.1 48.783,92.314 v2(50.419,90.678)
  Bottom Layer w0.256: v3(37.846,80.391) 37.846,86.868 41.656,90.678 v2(50.419,90.678)
NetGC4_1: GC4.1 GD1.6 GJ2.C1 U1.18 | length 77.6
  Top Layer w0.256: v2(27.178,62.992) 27.686,63.5 29.632,63.5 31.798,61.334 42.252,61.334 44.069,59.517 44.069,58.133 U1.18 ; v2(35.306,74.168) 34.544,73.406 GC4.1 36.058,76.745 GJ2.C1 ; v2(39.243,92.329) 39.228,92.314 GD1.6
  Bottom Layer w0.256: v2(27.178,62.992) 27.178,69.85 31.496,74.168 v2(35.306,74.168) 35.179,74.295 35.179,88.265 v2(39.243,92.329)
NetGD2_2: GD2.2 GR4.2
  other v1: 50.419,29.765
NetGQ1_1: GQ1.1 GR5.1 GR6.2 | length 3.7
  Top Layer w0.254: GQ1.1 59.671,30.8 v1(60.198,30.273)
NetGQ1_3: GQ1.3 GR4.1 | length 6.4
  Top Layer w0.254: v1@53.086,29.845 v1(53.149,29.845) 53.213,29.845 54.576,31.208 GQ1.3
  Bottom Layer w0.254: GR4.1 50.529,32.465 v1(53.149,29.845)
NetGQ2_1: GQ2.1 GR8.1 GR9.2 | length 6.2
  Top Layer w0.5: GR8.1@69.215,37.037 74.718,37.037 GQ2.1
NetGQ2_3: GQ2.3 GR7.1 GR10.1 U1.39 | length 52.6
  Top Layer w0.5: GR10.1 38.053,37.338 v2(38.481,37.338) ; U1.39 46.392,38.952 v2(48.133,37.211) 49.403,35.941 54.483,35.941 55.753,37.211 63.246,37.211 64.504,38.469 78.531,38.469 79.883,37.117 78.93,37.117 GQ2.3
  Bottom Layer w0.5: v2(38.481,37.338) 39.624,36.195 47.498,36.195 48.26,36.957 48.133,37.084 v2(48.133,37.211)
NetGR1_2: GR1.2 U1.17 | length 37.8
  Top Layer w0.256: v2(28.575,65.278) 32.004,61.849 43.688,61.849 45.292,60.245 U1.17 ; GR1.2 28.702,79.074 28.702,70.104 30.099,68.707 v2(30.226,68.707)
  Bottom Layer w0.256: v2(28.575,65.278) 30.226,66.929 v2(30.226,68.707)
NetGR2_2: GR2.2 U1.15 | length 40.7
  Top Layer w0.256: U1.15 47.625,58.389 47.625,59.563 49.276,61.214 52.324,61.214 67.818,76.708 67.818,82.296 65.278,84.836 GR2.2
NetGR3_2: GR3.2 U1.16 | length 44.4
  Top Layer w0.256: GR3.2 27.813,85.297 27.813,68.834 33.909,62.738 45.085,62.738 46.228,61.595 46.228,58.42 U1.16
NetGR5_2: GR5.2 U1.41 | length 16.5
  Top Layer w0.254: U1.41 48.592,39.038 50.419,37.211 v1(51.308,37.211)
  Bottom Layer w0.254: v1(51.308,37.211) 57.277,37.211 60.325,34.163 60.325,32.973 GR5.2
NetGR10_2: GR10.2 sw1.2 | length 5.8
  Top Layer w0.5: sw1.2 30.203,37.592 GR10.2
NetP?_2: P?.2 UR3.2 | length 4.5
  Top Layer w1: P?.2@26.67,54.102 29.765,54.102 UR3.2
NetP?_3: P?.3 UR5.1 | length 4.8
  Top Layer w1: P?.3@27.051,56.261 31.449,56.261 UR5.1
NetRC3_2: RC3.2 REG2.4 RR1_1.2 RR2.2 | length 8.4
  Top Layer w0.254: REG2.4 87.171,81.946 RC3.2 87.456,81.661 RR1_1.2@91.93,81.661
  Bottom Layer w0.254: RR2.2@87.171,81.946 RR2.2
  other v1: 87.376,81.788
NetRC7_2: RC7.2 REG3.4 RR4.2 RR5.2 RR6.2 | length 45.4
  Top Layer w0.254: RR6.2@80.09,104.267 v1(80.09,104.394) 80.09,108.012 RR4.2
  Top Layer w1: REG3.4 48.182,111.555 52.324,115.697 v1@54.991,115.697
  Bottom Layer w1: v1@54.864,115.697 75.184,115.697 79.883,110.998 RR5.2@79.883,108.204
  other v1: 80.391,108.204 54.864,115.951
NetRD2_2: RD2.2 REG2.2 RL1.1 | length 9.5
  Top Layer w1: RL1.1@82.082,76.454 83.693,78.065 83.693,85.214 REG2.2
NetRD3_2: RD3.2 REG3.2 RL2.1 | length 10.2
  Top Layer w1: REG3.2 44.896,108.168 RD3.2@50.673,108.168 ; RD3.2 54.813,108.295 RL2.1
NetRR1_1_1: RR1_1.1 RR1_2.2
  other v1: 92.583,84.328
NetSC1_1: SC1.1 SU1.3 | length 3.7
  Top Layer w0.254: SC1.1 65.817,62.912 SU1.3
NetSC1_2: SC1.2 SU1.1 | length 3.7
  Top Layer w0.254: SC1.2 62.916,65.198 SU1.1
NetSC3_1: SC3.1 SU1.2 | length 4.3
  Top Layer w0.5: v1@64.469,63.928 SU1.2
  Top Layer w1: v1(64.262,64.135) v1@64.469,63.928
  Bottom Layer w0.254: SC3.1 63.725,64.008 v1@64.389,64.008
NetSC4_1: SC4.1 SU1.4 | length 5.5
  Bottom Layer w0.254: SC4.1 61.929,59.135 64.262,61.468 65.913,61.468 65.913,61.595
  other v1: 65.278,61.341
NetSC4_2: SC4.2 SU1.5 | length 6.8
  Top Layer w0.256: v3(64.135,59.817) 64.389,60.071 65.024,60.071 65.071,60.118 SU1.5
  Bottom Layer w0.254: SC4.2 61.896,56.435 64.135,58.674 v3(64.135,59.817)
NetSC5_2: SC5.2 SU1.6 | length 5
  Top Layer w0.254: SC5.2 62.404,57.832 63.119,58.547 65.77,58.547 SU1.6
NetU1_1: U1.1 UR2.2 | length 6.2
  Top Layer w0.254: U1.1 54.511,42.037 UR2.2
NetU1_2: U1.2 UR1.1 | length 6.3
  Top Layer w0.254: U1.2 57.369,44.406 UR1.1
NetU1_22: U1.22 UR5.2 UR8.1 | length 6.9
  Top Layer w0.5: UR5.2@32.004,59.182 33.566,59.182 U1.22
  other v1: 31.75,59.262
NetU1_23: U1.23 UR3.1 UR7.1 | length 4.4
  Top Layer w0.256: UR3.1 34.701,54.306 U1.23
  other v1: 33.147,52.578
NetU1_42: U1.42 UR9.2 | length 25.6
  Top Layer w1: U1.42 51.032,39.116 61.849,39.116 67.183,44.45 v2(67.183,47.371)
  Bottom Layer w1: v2(67.183,47.371) 67.183,48.975 67.056,49.102 UR9.2
PA13: AP1.3 B1.34 | length 33.2
  Top Layer w0.256: v1@84.963,45.212 84.963,44.958 85.09,44.831 v1(85.09,45.212) 85.09,47.752 84.963,47.879 84.963,49.916 84.991,49.944 B1.34
  Bottom Layer w0.256: v1@84.963,45.212 84.963,40.64 85.725,39.878 93.218,39.878 94.234,38.862 94.361,38.862 94.361,35.306 AP1.3
PA14: AP1.4 B1.37 | length 43.8
  Top Layer w0.256: v2(80.645,49.657) 80.645,49.633 80.403,49.391 B1.37@82.503,49.391
  Bottom Layer w0.256: v2(80.645,49.657) 80.645,50.419 83.312,53.086 90.932,53.086 97.537,46.481 97.537,42.038 96.012,40.513 96.012,34.798 90.932,29.718 AP1.4
PB3: AP1.5 B1.39 | length 47.6
  Top Layer w0.256: v2(79.756,48.387) 79.784,48.359 B1.39
  Bottom Layer w0.256: v2(79.756,48.387) 79.883,48.26 79.883,48.006 79.375,48.514 79.375,49.87 83.101,53.596 91.143,53.596 98.047,46.692 98.047,34.674 93.472,30.099 AP1.5
POS_RX: P2.2 SU1.7 | length 37.7
  Top Layer w0.256: SU1.7 66.755,57.578 v2(68.834,55.499) ; v2(78.359,59.563) 78.867,59.563 80.342,58.088 86.143,58.088 89.113,55.118 P2.2
  Bottom Layer w0.256: v2(68.834,55.499) 69.088,55.499 69.088,58.42 72.644,61.976 75.946,61.976 v2(78.359,59.563)
POS_TX: P2.3 SU1.13 | length 26.3
  Top Layer w0.256: SU1.13 85.17,61.388 88.646,57.912 95.377,57.912 P2.3
RESET: AC1.1 AP1.6 AR1.2 B1.7 | length 28.9
  Top Layer w0.256: B1.7 86.991,43.565 86.36,44.196 86.36,45.72 87.503,46.863 v2(87.63,46.863) ; AR1.2 96.012,42.719 AP1.6
  Bottom Layer w0.256: v2(87.63,46.863) 90.551,46.863 92.964,44.45 v1(94.615,44.45)
V12: DR1.1 GR7.2 P4.3 PC2.1 RC5.1 RC9.1 RC12.1 RC13.1 reg1.3 REG2.1 REG3.1 | length 204
  Top Layer w0.5: v2(69.596,46.736) 69.596,46.99 69.723,46.863 69.723,46.609 71.247,45.085 v2@71.247,40.513 ; DR1.1 75.166,44.432 v2@71.247,40.513 ; GR7.2@79.883,34.417 GR7.2 82.423,34.417 82.677,34.671 82.677,37.211 79.502,40.386 v2(71.374,40.386) v2@71.247,40.513
  Top Layer w1: RC9.1@37.164,101.52 RC9.1 39.52,101.092 ; REG3.1 39.52,101.092 ; RC5.1 72.524,98.004 RC13.1 ; v2(79.756,84.709) 80.726,84.709 80.853,84.582 81.563,85.292 REG2.1 ; P4.3 94.107,111.379 84.709,101.981 80.05,101.981 RC13.1 ; 39.52,101.092 40.663,99.949 74.128,99.949 RC13.1
  Bottom Layer w0.5: 66.294,45.212 68.072,45.212 v2(69.596,46.736) ; PC2.1@68.372,37.13 70.245,39.003 reg1.3 71.247,39.786 71.374,39.913 v2(71.374,40.386)
  Bottom Layer w1: 66.294,45.212 63.5,48.006 63.5,54.356 67.945,58.801 67.945,69.85 71.628,73.533 71.628,84.709 ; RC12.1 68.754,98.004 73.747,98.004 ; RC13.1 73.747,98.004 ; v2(79.756,84.709) 71.628,84.709 ; 71.628,84.709 68.58,87.757 68.58,92.837 73.747,98.004
VBAT: CERAMIC.2 GD2.1 P4.2 P?.1 RC1.2 RC2.2 RC3.1 RC4.1 RC6.1 RC10.1 RD1.2 RL1.2 RR2.1 U1.34 U1.35 | length 224.2
  Top Layer w1.2: P?.1 26.797,33.274 v1(27.813,32.258) ; v5(33.02,35.687) 34.743,33.964 35.496,33.964 ; RD1.2@35.941,33.964 35.496,33.964 ; U1.34 40.822,40.386 U1.35@41.783,40.386 ; 41.275,40.073 41.275,34.011 RC10.1@41.805,33.481 ; GD2.1 50.211,32.674 v1(46.99,32.674) 46.771,32.893 42.393,32.893 v1(41.91,33.376) RC10.1@41.805,33.481 ; RC3.1 87.249,76.621 87.082,76.454 88.9,76.454 ; v2(88.519,62.23) 88.519,61.976 89.853,63.31 RC4.1 ; RC4.1@90.488,67.818 90.488,74.866 88.9,76.454 ; RC6.1 89.393,76.541 89.114,76.541 89.027,76.454 88.9,76.454 ; 35.496,33.964 35.978,33.481 RC10.1@41.805,33.481
  Bottom Layer w0.8: 62.992,37.719 75.481,50.208
  Bottom Layer w1: v2(88.519,62.23) 89.027,62.738 90.805,62.738 91.059,62.992 92.964,62.992 97.012,67.04 97.012,103.267 91.567,108.712 P4.2
  Bottom Layer w1.2: v5(33.02,35.687) 30.988,35.687 27.813,32.512 v1(27.813,32.258) 27.813,29.464 29.464,27.813 61.595,27.813 62.992,29.21 62.992,37.719 ; 75.481,50.208 75.491,50.208 76.284,51.001 76.284,51.011 87.503,62.23 v2(88.519,62.23) ; RL1.2@87.082,76.454 87.376,76.748 RR2.1
  other v1: 36.195,33.782
pads on no net: B1.2 B1.3 B1.4 B1.5 B1.6 B1.15 B1.16 B1.17 B1.18 B1.19 B1.20 B1.25 B1.26 B1.27 B1.28 B1.29 B1.33 B1.38 B1.40 B1.41 B1.42 B1.43 B1.45 B1.46 GD1.5 GJ2.8 GJ2.9 GJ2.10 GJ2.11 GJ2.C6 SU1.8 SU1.9 SU1.11 SU1.14 U1.3 U1.4 U1.5 U1.6 U1.7 U1.9 U1.10 U1.11 U1.12 U1.14 U1.20 U1.24 U1.25 U1.26 U1.28 U1.29 U1.38 U1.40

## Polygon pours and split planes (outlines as drawn)
GND on Bottom Layer "Top Layer-No Net" (solid, pour order 4): 77.851,87.122 77.851,101.473 95.885,101.473 96.012,101.6 96.012,87.122 81.915,87.122
GND on Bottom Layer "Top Layer-No Net" (solid, pour order 0): 28.765,116.713 28.892,116.84 50.102,116.84 52.197,116.84 52.197,97.536 50.228,97.536 28.765,97.536
GND on Bottom Layer "Top Layer-No Net" (solid, pour order 6): 34.798,61.087 34.798,38.608 34.671,38.481 55.245,38.481 55.245,61.087
GND on Bottom Layer "Top Layer-No Net" (solid, pour order 8): 26.416,49.784 34.798,49.784 34.798,38.52 34.837,38.481 26.416,38.481

## Keep-outs
Keep-Out Layer:
  lines w0.254: 25.146,25.654 98.806,25.654 98.806,117.475 25.654,117.475 25.654,25.781

## Other copper
Top Layer:
  rectangle net GND: 38.608,41.91 40.64,46.863
  text "Portablizer / v0.1" at 27.559,94.996 h1.2